# EAGLE board Front ECU rev8 (EAGLE 9.1.3)
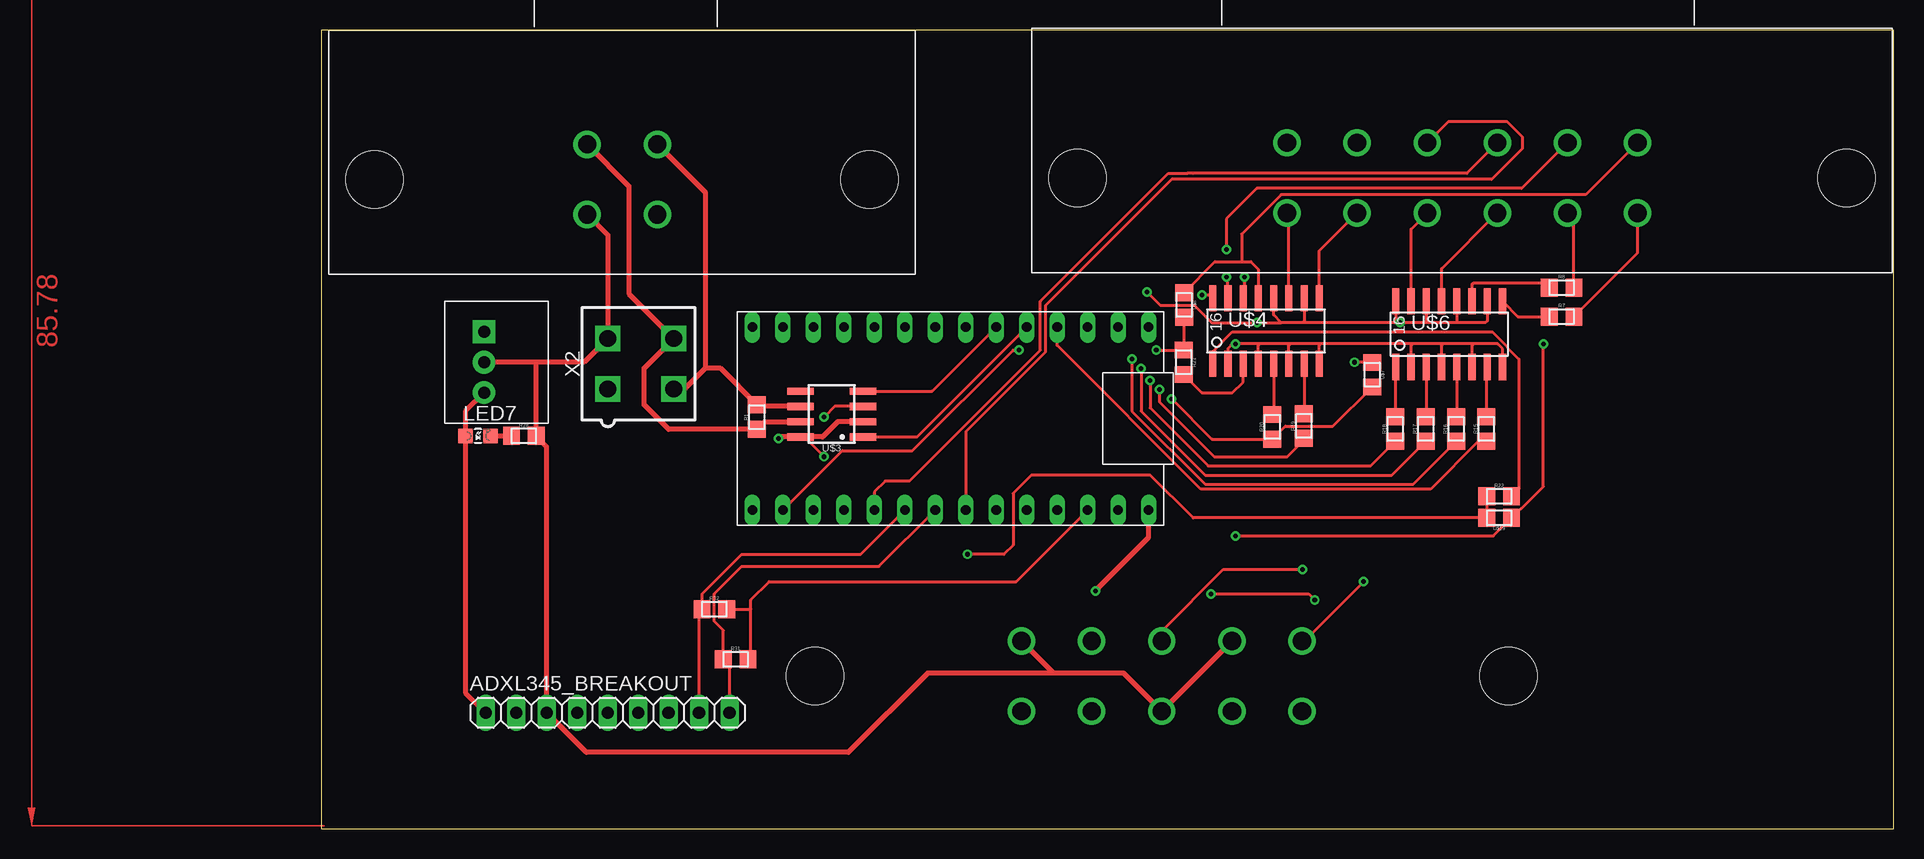
[diagram p0: board, top side]
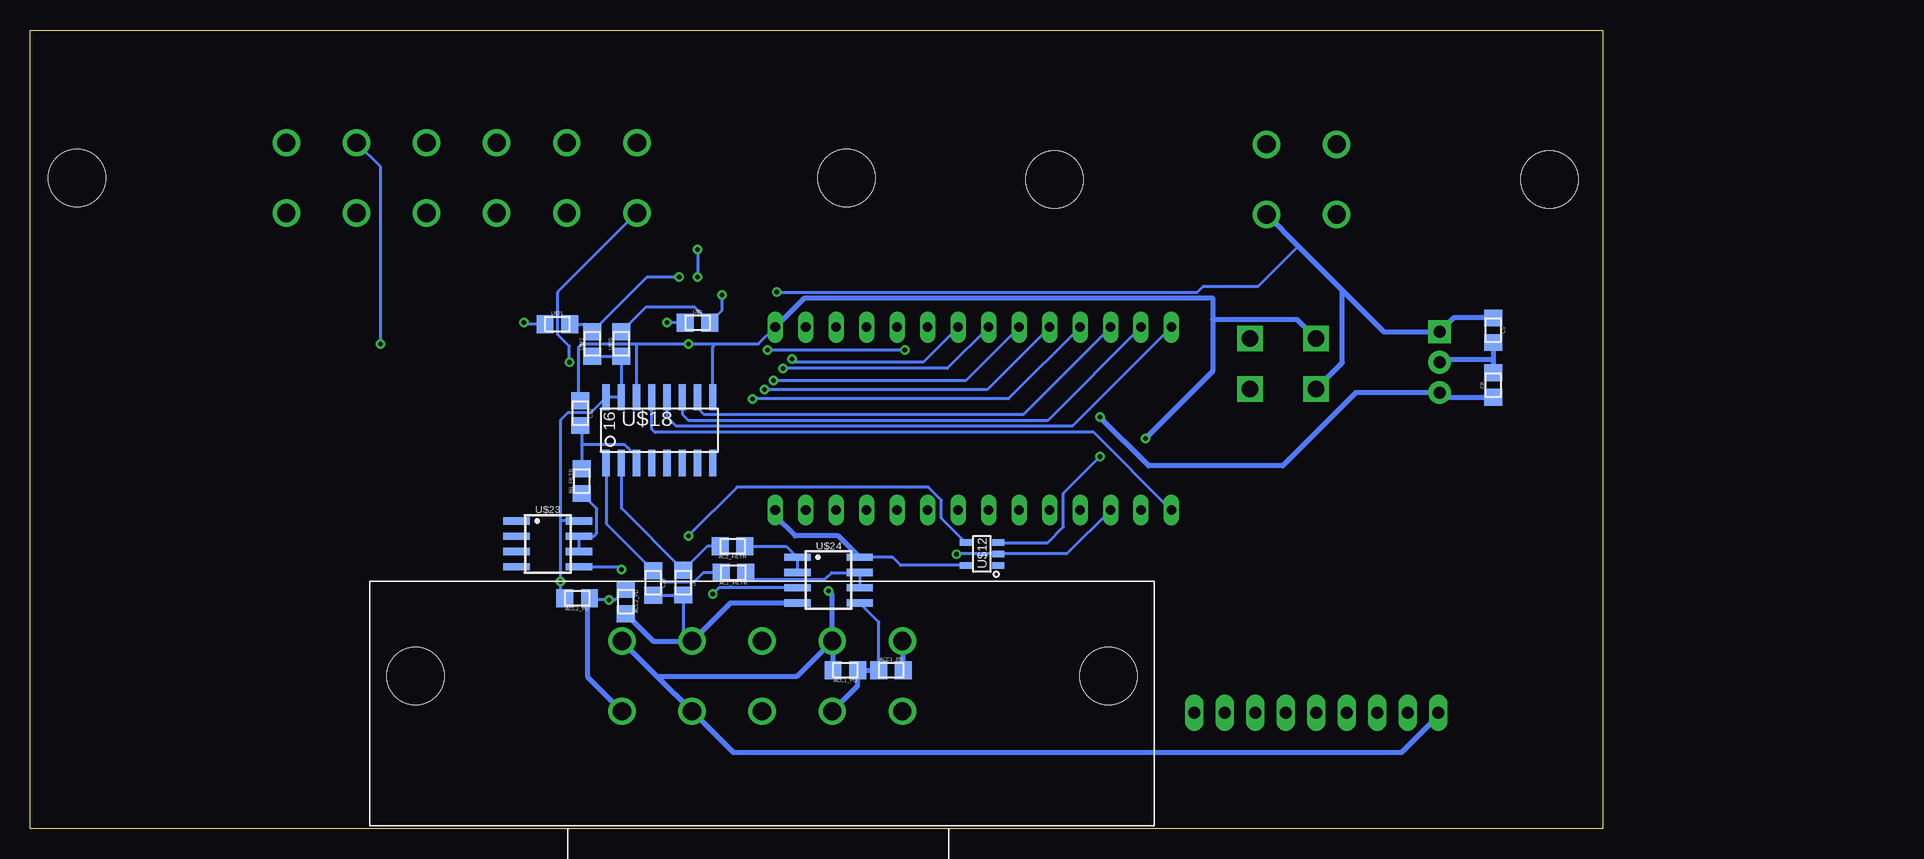
[diagram p1: board, bottom side, seen from below]

Size 131.06 x 66.55 mm. Coordinates in mm from the lower left corner, seen from the top.
Outline: 0,0 131.06,0 131.06,66.55 0,66.55 0,0
Copper layers (1*16): Top 0.035mm / dielectric 1.5mm / Bottom 0.035mm
Design rules "DRC Advanced Circuits": minimum track width 6mil, minimum drill 15mil, track to track 6mil, track to pad 6mil, pad to pad 6mil, via to via 6mil, smd to smd 6mil, copper to edge 40mil, drill to drill 6mil, minimum pad ring 10mil, minimum via ring 8mil, stop-mask expansion 4mil, vias tented up to drill 0mil, thermal gap 10mil
Holes 3.43 mm at -86.64,-12.4 -86.64,-70.31
tKeepout: area -90.9,-74.5 to -82.5,-66.2; area -90.8,-16.7 to -82.5,-8.3

## Footprints (pad centres in the part's own frame; a part is rotated, then mirrored left to right if it is on the bottom)
0805 = smd 1.4 x 1.5: 1 -1.025,0; 2 1.025,0
1X09 = drill 1.016 long: 1 -8.89,0; 2 -6.35,0; 3 -3.81,0; 4 -1.27,0; 5 1.27,0; 6 3.81,0; 7 6.35,0; 8 8.89,0; 9 11.43,0
OKI-78SR = drill 1 pad 1.88 square: 1 -2.54,0 | drill 1 pad 1.88: 2 0,0; 3 2.54,0
LED-805 = smd 1.2 x 1.2: A 0,-1.05; C 0,1.05
TEENSY_3.2_SIMPLE = drill 0.8 long: 3.3V 16.51,29.21; A0 16.51,3.81; A1 16.51,6.35; A2 16.51,8.89; A3 16.51,11.43; A4 16.51,13.97; A5 16.51,16.51; A6 16.51,19.05; A7 16.51,21.59; A8 16.51,24.13; A9 16.51,26.67; AGND 16.51,31.75; D0(RX1) 1.27,31.75; D1(TX1) 1.27,29.21; D2 1.27,26.67; D3(CANTX) 1.27,24.13; D4(CANRX) 1.27,21.59; D5 1.27,19.05; D6 1.27,16.51; D7(RX3) 1.27,13.97; D8(TX3) 1.27,11.43; D9(RX2) 1.27,8.89; D10(TX2) 1.27,6.35; D11 1.27,3.81; D12 1.27,1.27; D13 16.51,1.27; GND 1.27,34.29; VIN 16.51,34.29
SOIC-08 = smd 0.6 x 2.2: 1 -1.905,-2.6; 2 -0.635,-2.6; 3 0.635,-2.6; 4 1.905,-2.6; 5 1.905,2.6; 6 0.635,2.6; 7 -0.635,2.6; 8 -1.905,2.6
SOIC-16 = smd 0.6 x 2.2: 1 -4.445,-2.794; 2 -3.175,-2.794; 3 -1.905,-2.794; 4 -0.635,-2.794; 5 0.635,-2.794; 6 1.905,-2.794; 7 3.175,-2.794; 8 4.445,-2.794; 9 4.445,2.667; 10 3.175,2.667; 11 1.905,2.667; 12 0.635,2.667; 13 -0.635,2.667; 14 -1.905,2.667; 15 -3.175,2.667; 16 -4.445,2.667
SOT-23-5 = smd 1 x 0.55: 1 -1.35,0.95; 2 -1.35,0; 3 -1.35,-0.95; 4 1.35,-0.95; 5 1.35,0.95
MINIFIT_5566-4 = drill 1.4 square: 1 2.1,-2.75; 2 -2.1,-2.75; 3 2.1,2.75; 4 -2.1,2.75
MX150L_RIGHT_ANGLE-4 = drill 1.524: P$1 17.678,2.921; P$2 23.52,2.921; P$3 17.678,-2.921; P$4 23.52,-2.921 | hole 4.775: 0,0; 41.25,0
MX150L_RIGHT_ANGLE-10 = drill 1.524: 1 17.196,2.921; 2 23.038,2.921; 3 28.88,2.921; 4 34.722,2.921; 5 40.564,2.921; 6 17.196,-2.921; 7 23.038,-2.921; 8 28.88,-2.921; 9 34.722,-2.921; 10 40.564,-2.921 | hole 4.775: 0,0; 57.76,0
MX150L_RIGHT_ANGLE-12 = drill 1.524: 1 17.424,2.921; 2 23.266,2.921; 3 29.108,2.921; 4 34.95,2.921; 5 40.792,2.921; 6 46.634,2.921; 7 17.424,-2.921; 8 23.266,-2.921; 9 29.108,-2.921; 10 34.95,-2.921; 11 40.792,-2.921; 12 46.634,-2.921 | hole 4.775: 0,0; 64.11,0

## Placement (x,y rotation side)
AC1_FILTR  510  [0805]  72.44,21.34 180 bottom
AC2_FILTR  510  [0805]  72.52,23.52 180 bottom
ACC1_PD  10k  [0805]  59.31,13.21 0 bottom
ACC1_PU  10k  [0805]  63.12,13.21 180 bottom
ACC2_PD  10k  [0805]  81.41,18.92 270 bottom
ACC2_PU  10k  [0805]  85.47,19.18 180 bottom
ADXL345_BREAKOUT  [1X09]  22.61,9.65 0 top
BR_FILTR  100  [0805]  85.09,28.96 90 bottom
C5  10uF  [0805]  9.14,41.53 270 bottom
C8  10uF  [0805]  9.14,36.96 90 bottom
C9  22µ  [0805]  76.61,20.5 270 bottom
C10  22µ  [0805]  79.15,20.47 270 bottom
C12  2.2µ  [0805]  85.19,34.62 270 bottom
IC3  OKI-78SR  [OKI-78SR]  13.59,38.86 270 top
LED7  PURPLE  [LED-805]  13.08,32.72 270 top
R1  120  [0805]  36.32,34.29 90 top
R7  0  [0805]  103.38,42.67 0 top
R8  0  [0805]  103.38,45.09 0 top
R15  270  [0805]  97.1,33.3 90 top
R16  270  [0805]  94.59,33.3 90 top
R17  270  [0805]  92.05,33.3 90 top
R18  270  [0805]  89.51,33.3 90 top
R19  270  [0805]  81.89,33.55 90 top
R20  270  [0805]  79.27,33.48 90 top
R21  270  [0805]  71.88,38.86 270 top
R22  270  [0805]  98.17,27.69 0 top
R28  200  [0805]  16.89,32.72 0 top
R31  4.7k  [0805]  34.54,14.1 0 top
R32  4.7k  [0805]  32.77,18.29 0 top
U$1  TEENSY_3.2_SIMPLE  [TEENSY_3.2_SIMPLE]  34.67,43.05 270 top
U$3  MCP2551  [SOIC-08]  42.55,34.54 90 top
U$4  TLP291-4  [SOIC-16]  78.74,41.53 0 top
U$6  TLP291-4  [SOIC-16]  94.01,41.27 0 top
U$7  JUMPER  [0805]  87.58,37.82 270 top
U$8  JUMPER  [0805]  71.91,43.64 270 top
U$9  JUMPER  [0805]  75.44,42.16 0 bottom
U$12  SN74LV1T34  [SOT-23-5]  51.74,22.89 180 bottom
U$18  MCP3208SOIC  [SOIC-16]  78.61,33.27 0 bottom
U$19  JUMPER  [0805]  98.17,25.88 180 top
U$20  JUMPER  [0805]  81.79,40.39 90 bottom
U$21  JUMPER  [0805]  87.12,42.04 0 bottom
U$22  JUMPER  [0805]  84.2,40.39 90 bottom
U$23  MCP6002SOIC  [SOIC-08]  87.91,23.72 270 bottom
U$24  MCP6002SOIC  [SOIC-08]  64.52,20.7 270 bottom
X2  CONNECTOR-4  [MINIFIT_5566-4]  26.64,38.73 270 top
X3  CONNECTOR-4MX150-RIGHT_ANGLE-4  [MX150L_RIGHT_ANGLE-4]  45.69,54.1 180 top
X4  CONNECTOR-10MX150L-RIGHT_ANGLE-10  [MX150L_RIGHT_ANGLE-10]  98.93,12.7 0 bottom
X5  CONNECTOR-12MX150L_RIGHT_ANGLE-12  [MX150L_RIGHT_ANGLE-12]  127.13,54.23 180 top

## Library data of the parts
AC1_FILTR AC2_FILTR ACC1_PD ACC1_PU ACC2_PD ACC2_PU ADXL345_BREAKOUT BR_FILTR C5 C8-C10 C12 IC3 LED7 R1 R7 R8 R15-R22 R28 R31 R32 U$1 U$3 U$4 U$6-U$9 U$12 U$18-U$24 X3-X5 = HyTechDevices
X2 = HyTechDevices; OC_FARNELL: unknown; OC_NEWARK: unknown

## Nets
3.3V+: R31.2 R32.2 U$1.3.3V
+5V: ACC1_PU.2 ACC2_PU.2 ADXL345_BREAKOUT.1 C8.1 IC3.3 LED7.A U$1.VIN U$3.3 U$12.5 U$18.15 U$18.16 U$20.1 U$22.1 U$23.8 U$24.8 X4.1 X4.4 X4.7
+12V: C5.1 IC3.1 U$4.10 U$4.12 U$6.10 U$6.12 U$6.14 U$6.16 U$9.1 U$21.1 X2.1 X3.P$1
CANH: R1.1 U$3.7 X2.4 X3.P$4
CANL: R1.2 U$3.6 X2.3 X3.P$3
CS_MCP3208: U$1.D10(TX2) U$18.10
DASH_CTRL1: R15.1 U$1.D2
DASH_CTRL2: R16.1 U$1.D5
DASH_CTRL3: R17.1 U$1.D6
DASH_CTRL4: R18.1 U$1.D7(RX3)
DASH_CTRL5: R19.1 U$1.D8(TX3)
DASH_CTRL6: R20.1 U$1.D9(RX2) U$7.2
DASH_CTRL7: R21.1 U$1.A0 U$8.2
DASH_CTRL8: R22.1 U$1.A1 U$12.2 U$19.2
DASH_CTRL9: U$1.A3 X5.9
DASH_CTRL10: U$1.A6 X5.10
DASH_IO1: R7.2 X5.1
DASH_IO2: R8.2 X5.2
DASH_IO3: U$6.13 X5.3
DASH_IO4: U$6.15 X5.4
DASH_IO5: U$4.9 X5.5
DASH_IO6: U$4.11 U$7.1 X5.6
DASH_IO7: U$4.13 U$8.1 X5.7
DASH_IO8: U$4.15 U$12.4 U$19.1 X5.8
GND: ACC1_PD.2 ACC2_PD.2 ADXL345_BREAKOUT.3 C5.2 C8.2 C9.2 C10.2 C12.1 IC3.2 R28.2 U$1.GND U$3.2 U$3.8 U$4.2 U$4.4 U$4.6 U$4.8 U$6.2 U$6.4 U$6.6 U$6.8 U$12.3 U$18.9 U$18.14 U$24.4 X2.2 X3.P$2 X4.2 X4.5 X4.8
MISO_TEENSY: U$1.D12 U$18.12
MOSI_TEENSY: U$1.D11 U$18.11
N$1: R7.1 U$6.9
N$2: U$1.D4(CANRX) U$3.4
N$3: R8.1 U$6.11
N$4: U$4.16 U$9.2 U$20.2
N$5: U$1.D3(CANTX) U$3.1
N$6: U$4.14 U$21.2 U$22.2
N$11: BR_FILTR.1 U$23.6 U$23.7
N$13: AC2_FILTR.1 U$24.1 U$24.2
N$17: AC1_FILTR.1 U$24.6 U$24.7
N$19: R15.2 U$6.7
N$24: R16.2 U$6.5
N$27: R21.2 U$4.3
N$28: R17.2 U$6.3
N$29: R18.2 U$6.1
N$31: R19.2 U$4.7
N$32: R20.2 U$4.5
N$35: R22.2 U$4.1
N$61: LED7.C R28.1
READ_ACCEL1: AC1_FILTR.2 C10.1 U$18.1
READ_ACCEL2: AC2_FILTR.2 C9.1 U$18.2
READ_BRAKE: BR_FILTR.2 C12.2 U$18.3
SCK_TEENSY: U$1.D13 U$18.13
SCL: ADXL345_BREAKOUT.9 R31.1 U$1.A5
SDA: ADXL345_BREAKOUT.8 R32.1 U$1.A4
SIGNAL_ACCEL1: ACC1_PD.1 ACC1_PU.1 U$24.5 X4.9
SIGNAL_ACCEL2: ACC2_PD.1 ACC2_PU.1 U$24.3 X4.6
SIGNAL_BRAKE: U$23.5 X4.3
SIGNAL_CURRENT: X4.10

## Tracks (layer width: path | path; a pad name or v marks a point on that pad's centre or on a via)
3.3V+
  Top 0.254: R31.2 35.81,14.34 35.81,18.29 | 35.81,18.29 35.81,19.05 37.34,20.57 57.91,20.57 U$1.3.3V | R32.2 35.81,18.29
+5V  (via drill 0.38)
  Top 0.254: v86.87,20.57 81.92,15.62 X4.1 | U$3.3 42.8,35.18 v41.91,34.29
  Top 0.406: IC3.3 12.03,34.76 LED7.A 12.03,11.34 ADXL345_BREAKOUT.1 | v64.52,19.81 68.96,24.26 U$1.VIN
  Bottom 0.254: ACC2_PU.2 86.87,19.55 v86.87,20.57 86.87,25.65 | 86.87,25.65 86.87,34.04 86.24,34.67 84.33,34.67 84.16,34.83 84.16,34.84 U$18.16 U$18.15 U$20.1 U$22.1 | U$23.8 85.33,25.65 86.87,25.65 | U$12.5 58.51,21.93 59.18,22.61 U$24.8
  Bottom 0.406: C8.1 13.2,35.93 IC3.3 20.57,36.32 26.67,30.23 37.85,30.23 v41.91,34.29 | X4.1 78.78,12.66 | 78.78,12.66 X4.7 72.47,6.35 16.76,6.35 13.72,9.4 ADXL345_BREAKOUT.1 | X4.4 67.17,12.66 78.78,12.66 | ACC1_PU.2 64.14,15.55 X4.4 | U$24.8 63.69,24.38 67.31,24.38 68.96,26.04 U$1.VIN | X4.4 64.21,19.51 v64.52,19.81
+12V  (via drill 0.38)
  Top 0.254: U$6.10 97.18,42.32 97.03,42.16 94.74,42.16 | 94.74,42.16 91.95,42.16 | 91.95,42.16 v89.92,42.16 89.66,42.16 | 89.66,42.16 81.79,42.16 | 81.79,42.16 80.01,42.16 | 80.01,42.16 79.38,42.8 U$4.12 | U$4.10 81.92,42.29 81.79,42.16 | U$6.16 89.56,42.27 89.66,42.16 | U$6.14 92.1,42.32 91.95,42.16 | U$6.12 94.64,42.27 94.74,42.16 | v68.83,44.7 69.96,43.58 71.03,43.58 71.04,43.59 72.77,43.59 74.2,42.16 v77.98,42.16 80.01,42.16
  Bottom 0.254: v68.83,44.7 33.78,44.7 33.27,45.21 28.7,45.21 25.38,48.54 | U$9.1 v77.98,42.16 | U$21.1 89.79,42.04 v89.92,42.16
  Bottom 0.406: C5.1 12.44,42.55 IC3.1 18.24,41.4 21.69,44.86 | X3.P$1 25.38,48.54 21.69,44.86 | X2.1 21.69,38.84 21.69,44.86
CANH
  Top 0.406: X3.P$4 25.65,53.54 25.65,44.58 X2.4 26.92,38.36 26.92,35.31 28.96,33.27 R1.1 36.97,33.91 U$3.7
CANL
  Top 0.406: X3.P$3 32,53.03 32,38.35 | 32,38.35 30.29,36.63 X2.3 | U$3.6 36.46,35.18 R1.2 33.28,38.35 32,38.35
CS_MCP3208
  Bottom 0.254: U$18.10 75.44,35.05 74.93,34.54 48.26,34.54 U$1.D10(TX2)
DASH_CTRL1
  Top 0.254: R15.1 96.44,32.27 92.46,28.3 73.3,28.3 61.34,40.26 U$1.D2
DASH_CTRL2  (via drill 0.38)
  Top 0.254: v67.56,39.12 67.56,34.8 73.66,28.7 91.02,28.7 R16.1
  Bottom 0.254: U$1.D5 56.64,38.86 67.31,38.86 v67.56,39.12
DASH_CTRL3  (via drill 0.38)
  Top 0.254: v68.33,38.35 68.33,34.8 73.66,29.46 89.24,29.46 R17.1
  Bottom 0.254: U$1.D6 54.61,38.35 v68.33,38.35
DASH_CTRL4  (via drill 0.38)
  Top 0.254: v69.09,37.34 69.09,35.05 73.91,30.23 87.46,30.23 R18.1
  Bottom 0.254: U$1.D7(RX3) 53.09,37.34 v69.09,37.34
DASH_CTRL5  (via drill 0.38)
  Top 0.254: v69.85,36.58 69.85,35.56 74.42,30.99 80.52,30.99 81.89,32.36 R19.1
  Bottom 0.254: U$1.D8(TX3) 51.31,36.58 v69.85,36.58
DASH_CTRL6  (via drill 0.38)
  Top 0.254: U$7.2 84.31,33.53 80.35,33.53 R20.1 74.23,32.45 v70.87,35.81
  Bottom 0.254: U$1.D9(RX2) 49.53,35.81 v70.87,35.81
DASH_CTRL7  (via drill 0.38)
  Top 0.254: U$8.2 71.91,39.91 R21.1 71.87,39.88 v69.6,39.88 | U$1.A0 43.43,31.5 49.28,31.5 57.66,39.88 v58.17,39.88
  Bottom 0.254: v58.17,39.88 v69.6,39.88
DASH_CTRL8  (via drill 0.38)
  Top 0.254: R22.1 U$19.2 72.67,25.88 69.09,29.46 59.18,29.46 57.66,27.94 57.66,23.62 56.9,22.86 v53.85,22.86
  Bottom 0.254: U$1.A1 44.68,22.89 U$12.2 53.82,22.89 v53.85,22.86
DASH_CTRL9
  Top 0.254: U$1.A3 46.1,28.07 46.99,28.96 49.02,28.96 59.94,39.88 59.94,43.94 70.61,54.61 72.19,54.61 72.64,54.61 95.48,54.61 X5.9
DASH_CTRL10
  Top 0.254: X5.10 93.95,58.93 98.81,58.93 100.08,57.66 100.08,56.64 97.54,54.1 70.87,54.1 60.35,43.59 60.35,39.71 53.72,33.08 U$1.A6
DASH_IO1
  Top 0.254: R7.2 109.7,47.97 X5.1
DASH_IO2
  Top 0.254: R8.2 104.4,50.77 X5.2
DASH_IO3
  Top 0.254: U$6.13 93.37,46.66 X5.3
DASH_IO4
  Top 0.254: U$6.15 90.83,49.96 X5.4
DASH_IO5
  Top 0.254: U$4.9 83.19,48.16 X5.5
DASH_IO6  (via drill 0.38)
  Top 0.254: U$7.1 86.12,38.85 v86.11,38.86 | U$4.11 80.64,51.16 X5.6
  Bottom 0.254: v86.11,38.86 86.11,40.2 87.08,41.17 87.08,44.72 X5.6
DASH_IO7
  Top 0.254: U$8.1 74.49,47.24 76.71,47.24 | 76.71,47.24 77.47,47.24 78.11,46.61 U$4.13 | X5.7 105.39,52.83 80,52.83 76.71,49.53 76.71,47.24
DASH_IO8  (via drill 0.38)
  Top 0.254: X5.8 100.05,53.34 77.98,53.34 75.44,50.8 v75.44,48.26 | U$4.15 75.56,45.85 v75.44,45.97 | v101.85,40.39 101.85,28.5 100.01,26.66 99.97,26.66 U$19.1 97.7,24.38 v76.2,24.38
  Bottom 0.254: v75.44,48.26 v75.44,45.97 | v101.85,40.39 101.85,55.14 X5.8 | U$12.4 55.12,25.86 55.12,27.37 56.19,28.45 72.14,28.45 v76.2,24.38
GND  (via drill 0.38)
  Top 0.254: U$6.8 98.45,39.98 98.04,40.39 96.01,40.39 | 96.01,40.39 93.47,40.39 | 93.47,40.39 90.93,40.39 | 90.93,40.39 83.06,40.39 | 83.06,40.39 80.77,40.39 | 80.77,40.39 77.98,40.39 | 77.98,40.39 v76.2,40.39 75.95,40.39 75.56,40.01 U$4.2 | U$4.4 78.11,40.26 77.98,40.39 | U$4.6 80.64,40.26 80.77,40.39 | U$4.8 83.19,40.26 83.06,40.39 | U$6.2 90.83,40.28 90.93,40.39 | U$6.4 93.37,40.28 93.47,40.39 | U$6.6 95.91,40.28 96.01,40.39 | v41.91,30.99 40.26,32.64 39.62,32.64
  Top 0.406: X3.P$2 23.89,49.46 X2.2 21.92,38.86 17.78,38.86 | 17.78,38.86 IC3.2 | 17.78,38.86 17.92,38.73 R28.2 18.8,31.84 ADXL345_BREAKOUT.3 22.1,6.35 43.94,6.35 50.55,12.95 61.04,12.95 | X4.2 X4.8 66.88,12.95 61.04,12.95 | 61.04,12.95 X4.5 | U$3.2 43.05,33.91 41.78,32.64 U$3.8 39.62,32.64 38.23,32.64 v38.1,32.51
  Bottom 0.254: 76.71,15.62 76.61,15.72 C9.2 76.63,19.45 C10.2 | U$1.GND 70.36,40.39 73.91,40.39 | 80.52,40.39 85.09,40.39 85.34,40.13 85.34,35.8 C12.1 | 80.52,40.39 v76.2,40.39 73.91,40.39 | U$18.9 74.17,40.13 73.91,40.39 | U$18.14 80.52,40.39 | U$12.3 46.27,23.84 44.96,25.15 44.96,27.94 v41.91,30.99
  Bottom 0.406: C5.2 9.14,39.12 | 9.14,39.12 C8.2 | IC3.2 13.34,39.12 9.14,39.12 | ACC1_PD.2 58.28,15.54 X4.5 | U$24.4 72.72,18.8 X4.2 76.71,15.62 79.13,15.62 ACC2_PD.2 | v38.1,32.51 32.51,38.1 32.51,42.42 | 32.51,42.42 32.51,44.2 66.55,44.2 U$1.GND | X2.2 25.48,42.42 32.51,42.42
MISO_TEENSY
  Bottom 0.254: U$18.12 77.98,34.29 77.22,33.53 76.2,33.53 44.2,33.53 U$1.D12
MOSI_TEENSY
  Bottom 0.254: U$18.11 76.71,34.54 76.2,34.04 46.23,34.04 U$1.D11
N$1
  Top 0.254: U$6.9 99.72,42.67 R7.1
N$2
  Top 0.254: U$3.4 50.93,36.45 U$1.D4(CANRX)
N$3
  Top 0.254: U$6.11 95.91,45.36 96.01,45.47 101.97,45.47 R8.1
N$4  (via drill 0.38)
  Top 0.254: U$4.16 74.04,44.45 v73.41,44.45
  Bottom 0.254: v73.41,44.45 73.41,43.17 U$9.2 75.68,43.43 79.77,43.43 U$20.2
N$5
  Top 0.254: U$3.1 49.66,32.64 U$1.D3(CANTX)
N$6  (via drill 0.38)
  Top 0.254: U$4.14 76.96,44.32 v76.96,45.97
  Bottom 0.254: U$22.2 79.64,45.97 v76.96,45.97 | U$22.2 84.58,41.41 | U$22.2 84.83,42.04 U$21.2
N$11
  Bottom 0.254: U$23.6 U$23.7 84.1,24.36 83.82,24.64 83.82,26.66 BR_FILTR.1
N$13
  Bottom 0.254: U$24.2 U$24.1 68.03,23.52 AC2_FILTR.1
N$17
  Bottom 0.254: U$24.6 U$24.7 64.26,21.34 64.84,20.76 70.84,20.76 AC1_FILTR.1 71.16,21.59
N$19
  Top 0.254: U$6.7 97.1,38.41 R15.2
N$24
  Top 0.254: U$6.5 94.64,34.38 R16.2
N$27
  Top 0.254: R21.2 73.4,36.32 75.95,36.32 76.83,37.21 U$4.3
N$28
  Top 0.254: U$6.3 92.1,34.38 R17.2
N$29
  Top 0.254: U$6.1 89.51,38.43 R18.2
N$31
  Top 0.254: U$4.7 81.92,34.6 R19.2
N$32
  Top 0.254: U$4.5 79.38,34.6 R20.2
N$35
  Top 0.254: U$4.1 74.3,39.75 75.95,41.4 97.6,41.4 98.86,40.15 98.86,40.08 99.82,39.12 99.82,28.31 R22.2
N$61
  Top 0.406: LED7.C R28.1
READ_ACCEL1
  Bottom 0.254: AC1_FILTR.2 74.95,21.34 75.74,20.54 78.19,20.54 C10.1 83.06,25.41 U$18.1
READ_ACCEL2
  Bottom 0.254: AC2_FILTR.2 74.61,23.52 C9.1 81.77,26.69 81.79,26.7 U$18.2
READ_BRAKE
  Bottom 0.254: U$18.3 80.52,30.99 81.21,31.68 81.21,31.7 81.52,32 85.09,32 | C12.2 85.09,33.49 85.09,32 | 85.09,32 BR_FILTR.2
SCK_TEENSY
  Bottom 0.254: U$18.13 79.25,33.27 78.99,33.02 42.42,33.02 U$1.D13
SCL
  Top 0.254: ADXL345_BREAKOUT.9 34.04,13.58 | R31.1 33.52,16.52 32.77,17.27 32.77,19.56 35.05,21.84 46.48,21.84 U$1.A5
  Top 0.406: 34.04,13.58 R31.1
SDA
  Top 0.254: ADXL345_BREAKOUT.8 31.5,18.04 R32.1 31.74,19.55 35.05,22.86 44.96,22.86 U$1.A4
SIGNAL_ACCEL1
  Bottom 0.254: ACC1_PD.1 60.33,17.21 U$24.5
  Bottom 0.406: X4.9 62.09,11.9 ACC1_PU.1 ACC1_PD.1
SIGNAL_ACCEL2  (via drill 0.38)
  Top 0.254: v74.17,19.56 82.3,19.56 v82.8,19.05
  Bottom 0.254: 81.28,19.82 ACC2_PD.1 82.31,19.05 v82.8,19.05 84.32,19.05 ACC2_PU.1 | U$24.3 73.66,20.07 v74.17,19.56
  Bottom 0.406: X4.6 84.58,12.62 84.58,19.04 ACC2_PU.1
SIGNAL_BRAKE  (via drill 0.38)
  Top 0.254: X4.3 70.05,16.46 75.18,21.59 v81.79,21.59
  Bottom 0.254: U$23.5 82.02,21.82 v81.79,21.59
(copper drawn outside any net)
  shapes: Top area x2